# Altium PCB LV_Switcher_PCB.PcbDoc
Units mm, origin at the board's own origin, x right, y up, seen from the top; angles counter-clockwise.
Board outline 50 x 50 mm, 2 copper layers (Top Layer, Bottom Layer); 35 components, 16 nets, 154 pads, 430 vias.
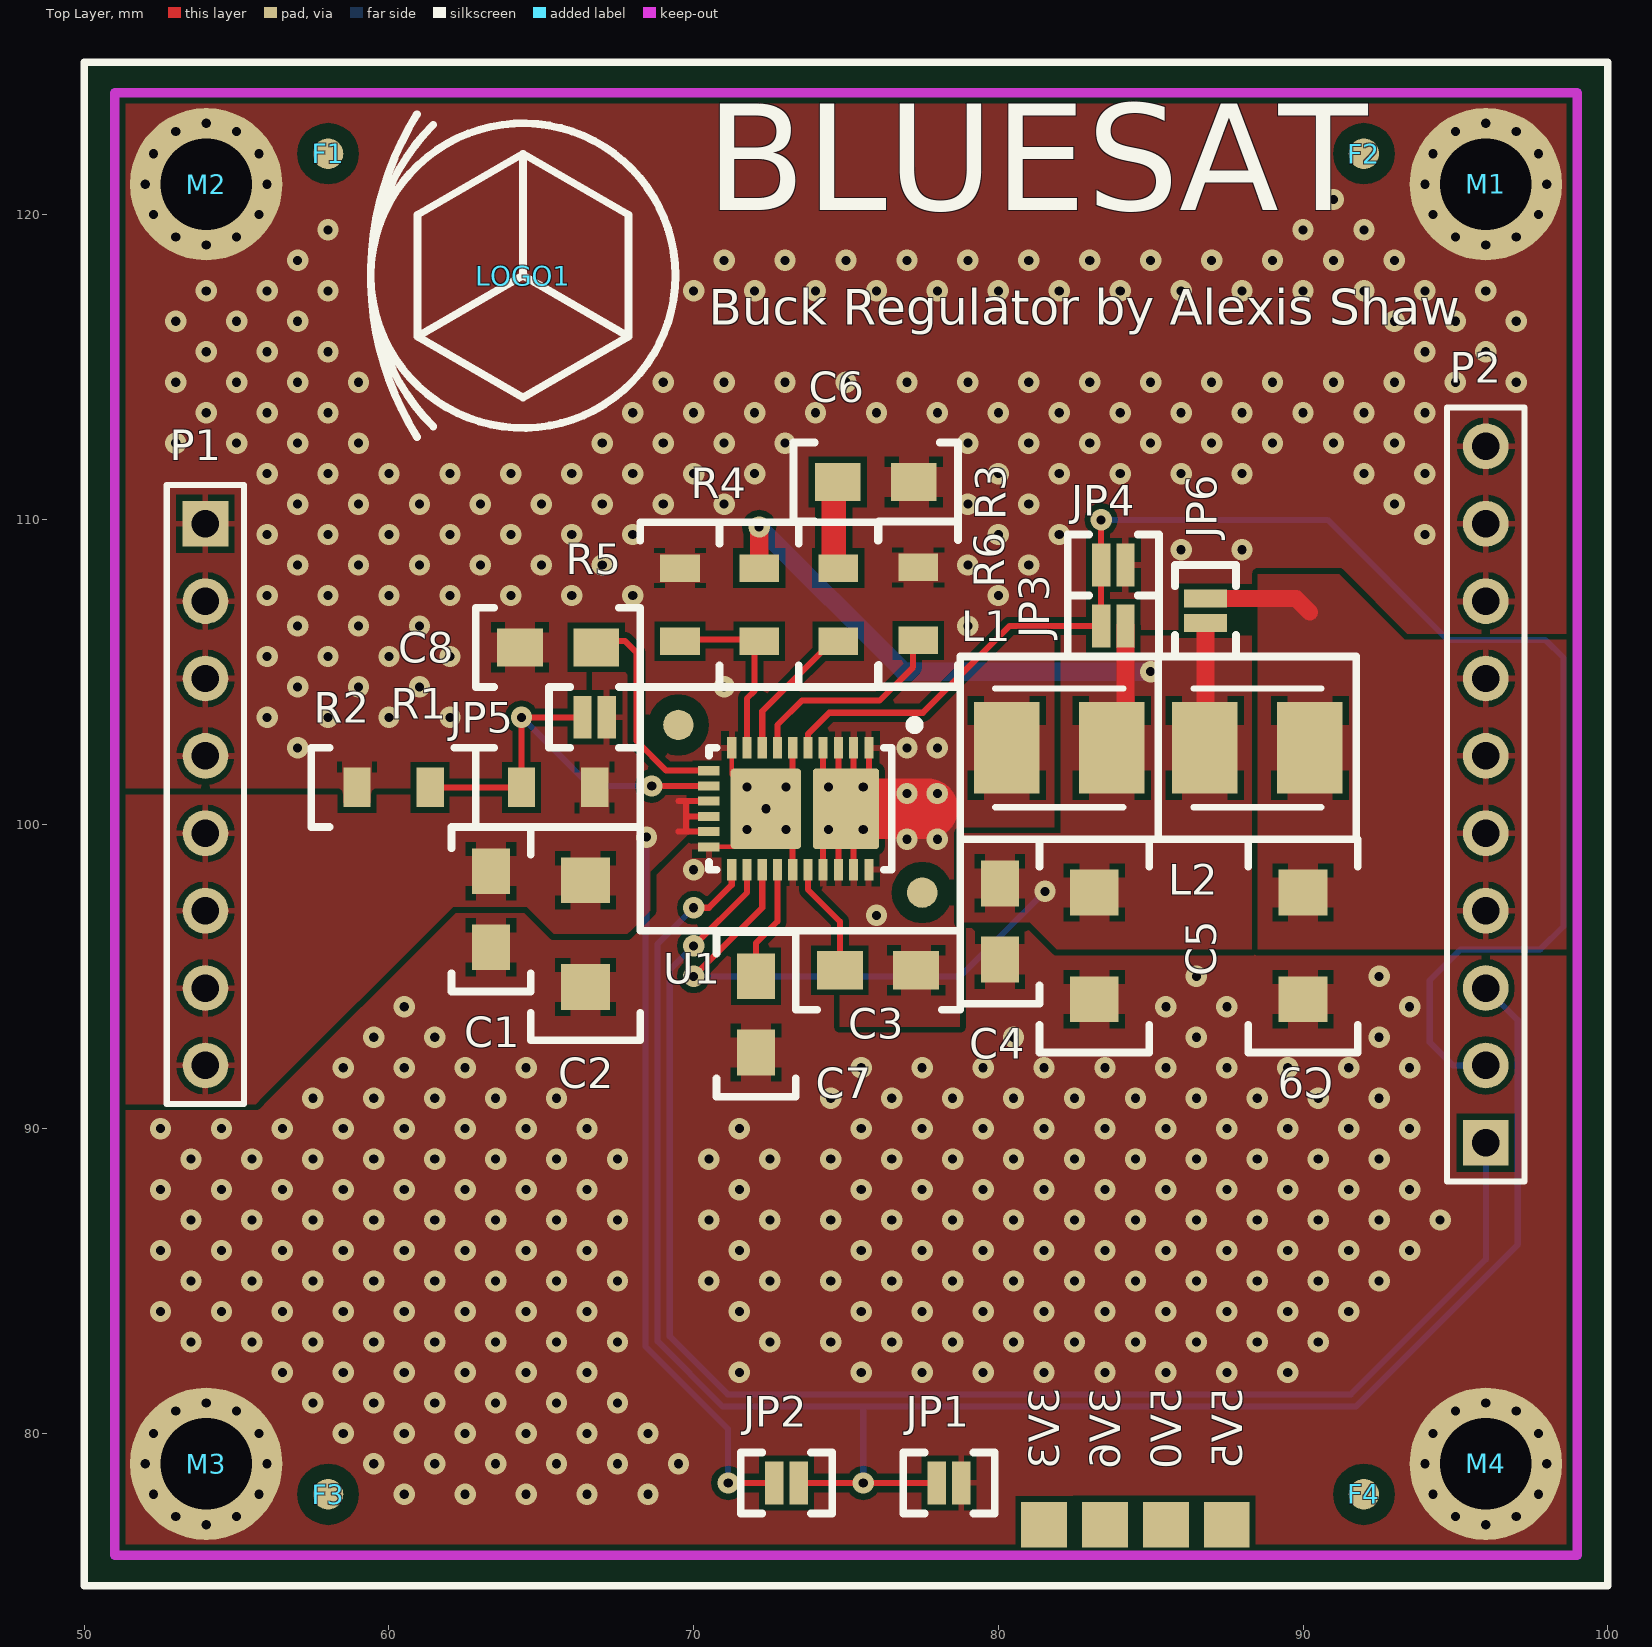
[diagram p0: Top Layer view]
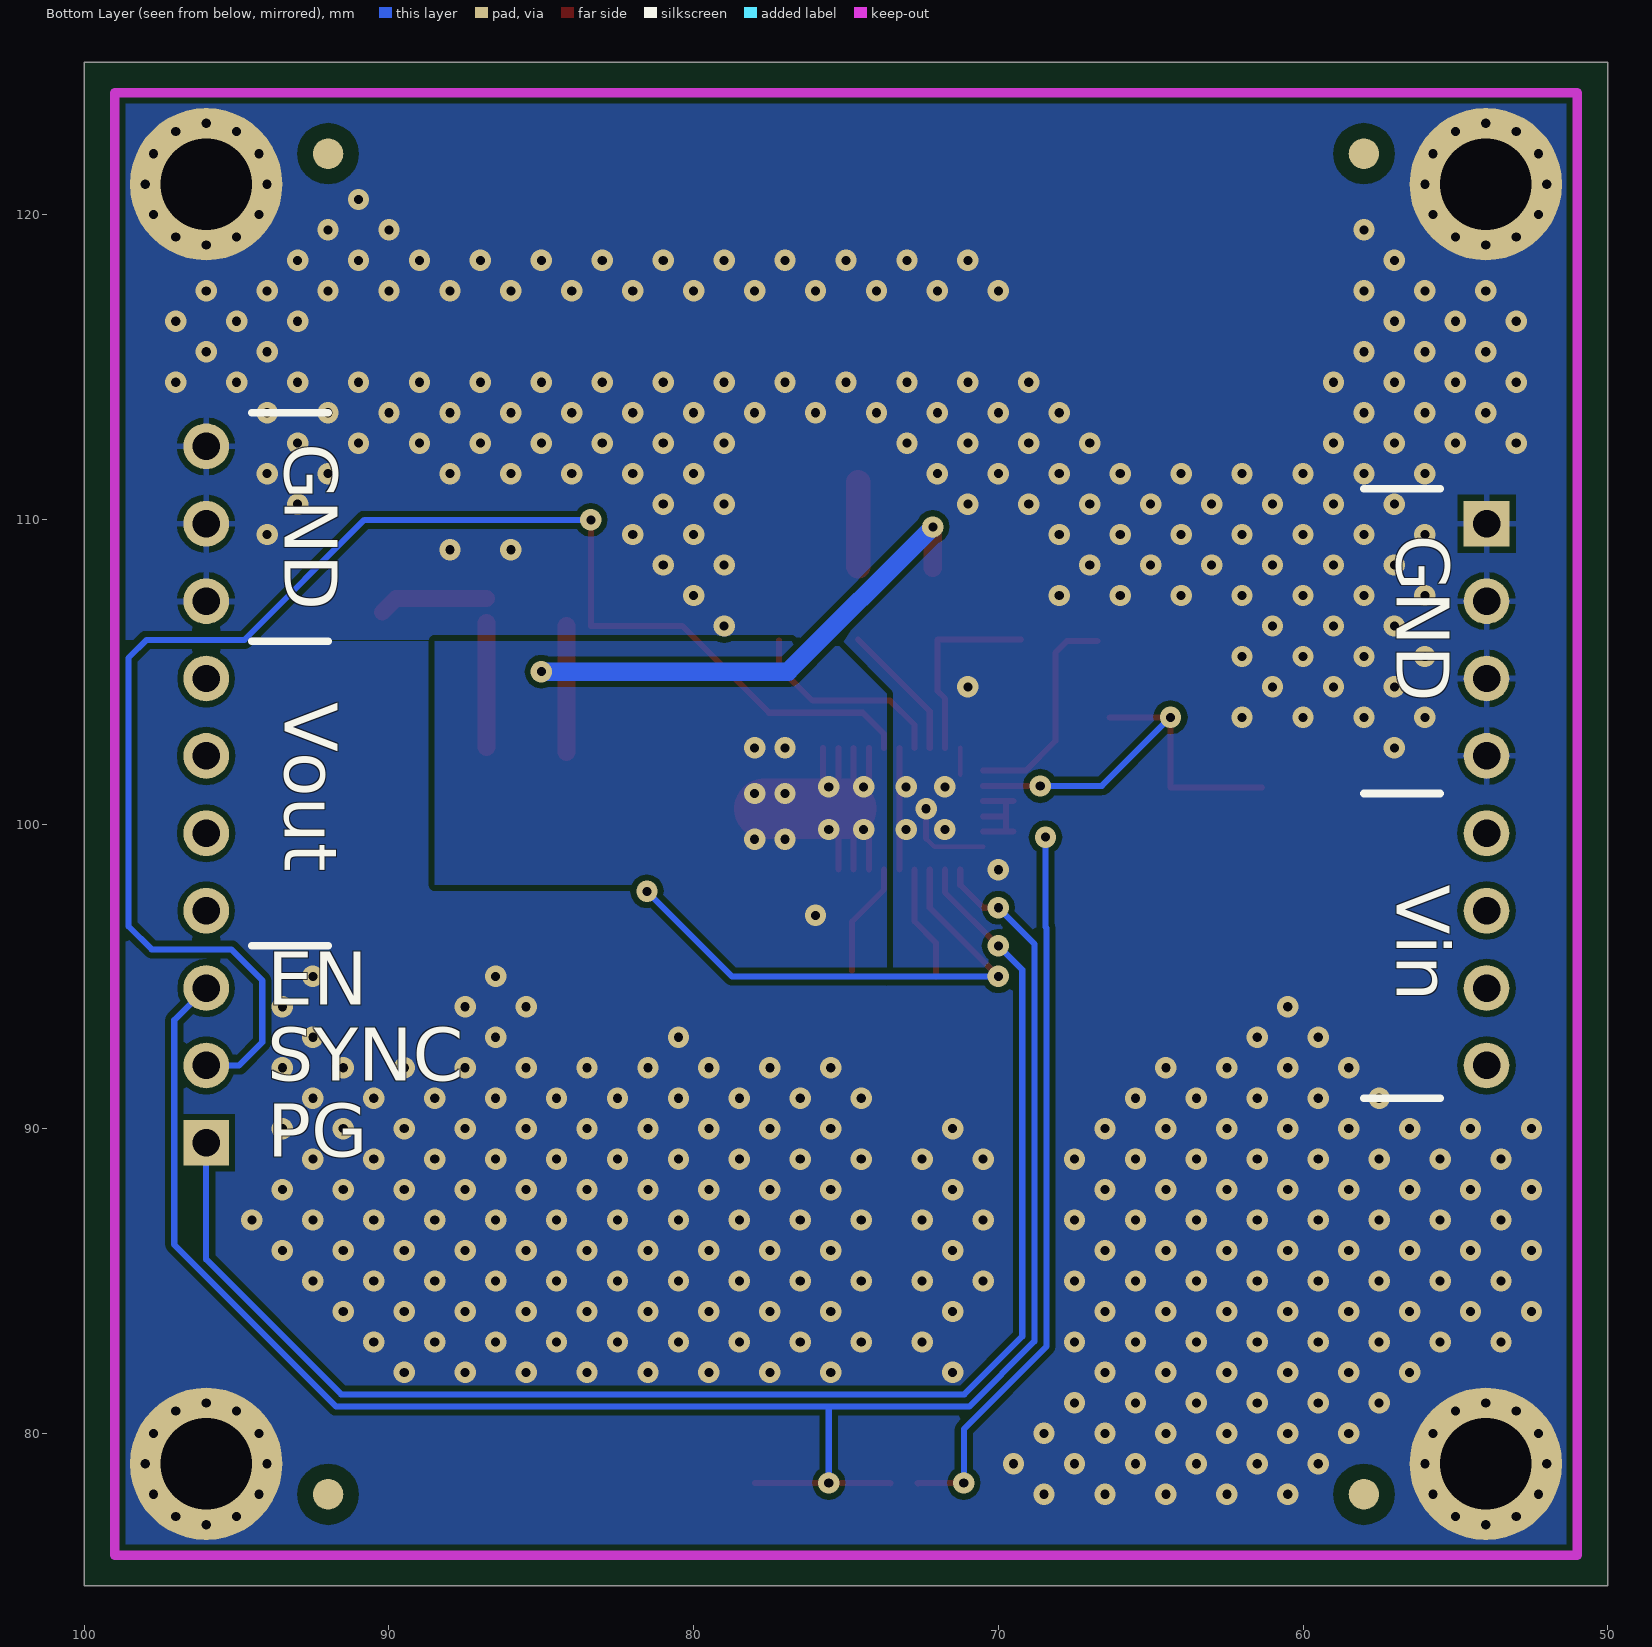
[diagram p1: Bottom Layer view, seen from below]

## Layer stack, top to bottom
Top Layer: signal copper 0.0356
Dielectric: dielectric 0.32, FR-4, Dk 4.8
Bottom Layer: signal copper 0.0356

## Board outline
50,75 100,75 100,125 50,125

## Design rules (kind name [scope] priority, off if disabled: settings)
Clearance Clearance_1 [All vs InPadClass('Fudicials')] p1: gap=0.5
Clearance [All] p2: gap=0.2
ComponentClearance [All] p1: gap=0 collisioncheckmode=3 verticalgap=0.254 showdistances=FALSE
HoleSize [All] p1: absolutevalues=TRUE maxlimit=3 minlimit=0.025 maxpercent=80.000 minpercent=20.000
MinimumSolderMaskSliver [All] p1: minsoldermaskwidth=0.1
PolygonConnect PolygonConnect_2 [All vs IsVia] p1: connectstyle=Direct reliefconductorwidth=0.254 reliefentries=4 polygonreliefangle="90 Angle"
PolygonConnect PolygonConnect_1 [All vs HasFootprint('Mounting_Hole')] p2: connectstyle=Direct reliefconductorwidth=0.254 reliefentries=4 polygonreliefangle="90 Angle"
PolygonConnect PolygonConnect_Caps [All vs HasFootprint('0805 Cap') OR HasFootprint('0805 Resistor') OR HasFootprint('1206 Cap')] p3: connectstyle=Relief reliefconductorwidth=1 reliefentries=4 polygonreliefangle="90 Angle"
PolygonConnect PolygonConnect_Inductors [All vs HasFootprint('INDP4037X16N')] p4: connectstyle=Relief reliefconductorwidth=1.5 reliefentries=4 polygonreliefangle="90 Angle"
PolygonConnect [All] p5: connectstyle=Relief reliefconductorwidth=0.2 reliefentries=4 polygonreliefangle="90 Angle"
RoomDefinition LV_Switcher [InComponentClass('LV_Switcher')] p1: confinementstyle=ConfineIn formatcopy=TRUE lockcomponents=FALSE outline 56.75,76 93,76 93,112.75 56.75,112.75
RoutingVias [All] p1: holewidth=0.3 width=0.7 viastyle="Through Hole" minholewidth=0.3 minwidth=0.7 maxholewidth=0.711 maxwidth=1.27
SilkscreenOverComponentPads [All] p1: minsilkscreentomaskgap=0.1
SolderMaskExpansion [All] p1: expansion=0.102
Width [All] p1: maxlimit=2 minlimit=0.15 preferedwidth=0.2
24 further rules are at their usual default settings.

## Classes and differential pairs
pad class Fudicials: F1-29 F2-29 F3-29 F4-29 U1-30 U1-31
component class LV_Switcher: C1 C2 C3 C4 C5 C6 C7 C8 JP1 JP2 JP3 JP4 JP5 L1 R1 R2 R3 R4 R5 R6 U1
component class Switching_Regulator_LV_Board: C9 F1 F2 F3 F4 JP6 L2 LOGO1 M1 M2 M3 M4 P1 P2

## Components (designator, comment, footprint, x,y, rotation, side; value= is the part's Value field where it differs from the comment)
C1 "0805 Cap" "0805 Cap" 63.35,97.2 r270 top
C2 "1206 Cap" "1206 Cap" 66.45,96.4 r270 top
C3 "0805 Cap" "0805 Cap" 76.05,95.2 r0 top
C4 "0805 Cap" "0805 Cap" 80.05,96.8 r270 top
C5 "1206 Cap" "1206 Cap" 83.15,96 r270 top
C6 "0805 Cap" "0805 Cap" 75.975,111.225 r0 top
C7 "0805 Cap" "0805 Cap" 72.05,93.75 r270 top
C8 "0805 Cap" "0805 Cap" 65.55,105.8 r180 top
C9 "0805 Cap" "1206 Cap" 90,96 r270 top
F1 "Fud" FUd 58,122 r0 top
F2 "Fud" FUd 92,122 r0 top
F3 "Fud" FUd 58,78 r0 top
F4 "Fud" FUd 92,78 r0 top
JP1 "Jumper" "Solder Jumper C" 78.383,78.372 r180 top
JP2 "Jumper" "Solder Jumper C" 73.049,78.372 r0 top
JP3 "Jumper" "Solder Jumper C" 83.775,106.5 r180 top
JP4 "Jumper" "Solder Jumper C" 83.775,108.5 r180 top
JP5 "Jumper" "Solder Jumper C" 66.75,103.5 r0 top
JP6 "Jumper" "Solder Jumper C" 86.8,107 r270 top
L1 "LQH44PN2R2MP0" INDP4037X16N 82,102.5 r0 top
L2 "LQH44PN2R2MP0" INDP4037X16N 88.5,102.5 r0 top
LOGO1 "Logo" BLUESAT_LOGO 64.4,118 r0 top
M1 "Mounting Hole" Mounting_Hole 96,121 r0 top
M2 "Mounting Hole" Mounting_Hole 54,121 r0 top
M3 "Mounting Hole" Mounting_Hole 54,79 r0 top
M4 "Mounting Hole" Mounting_Hole 96,79 r0 top
P1 "Header 8" HDR1X8 53.975,109.855 r270 top
P2 "Header 10" HDR1X10 96,89.535 r90 top
R1 "0805 Resistor" "0805 Resistor" 65.55,101.2 r180 top
R2 "0805 Resistor" "0805 Resistor" 60.15,101.2 r180 top
R3 "0805 Resistor" "0805 Resistor" 74.75,107.2 r90 top
R4 "0805 Resistor" "0805 Resistor" 72.15,107.2 r270 top
R5 "0805 Resistor" "0805 Resistor" 69.55,107.2 r90 top
R6 "0805 Resistor" "0805 Resistor" 77.375,107.225 r90 top
U1 "LT3690" LT3690 73.5,100.5 r180 top

## Footprints (in the part's own frame and the unit in brackets; to place one, negate y for a bottom-side part, rotate by r counter-clockwise, add the part's x,y. Pads: shape width x height; smd on the part's side, far side on the other; paste and mask are expansions set on the pad)
"0805 Cap" [mm] "0805 Capacitor"
  rect 1.5x1.25 smd: 1(1.25,0) 2(-1.25,0)
  silkscreen extent -2.7,-1.3 2.7,1.3, body extent -1,-0.63 1.1,0.63, height 0.9
"0805 Resistor" [mm] "0805 Resistor"
  rect 0.9x1.3 smd: 1(1.2,0) 2(-1.2,0)
  silkscreen extent -2.7,-1.3 2.7,1.3, body extent -1,-0.63 1.1,0.63, height 0.6
"1206 Cap" [mm] "1206 Capacitor"
  rect 1.5x1.6 smd: 1(1.75,0) 2(-1.75,0)
  silkscreen extent -3.5,-1.8 3.5,1.8, body extent -1.6,-0.8 1.6,0.8, height 1.8
BLUESAT_LOGO [mm]
  silkscreen extent -5,-5.3 5,5.3
FUd [mm]
  round 1 all layers, no hole mask+0.5: 29(0,0)
HDR1X8 [mm] "Connector; Header; 8 Position"
  rect 1.5x1.5 hole 0.9: 1(0,0)
  round 1.5 hole 0.9: 2(2.54,0) 3(5.08,0) 4(7.62,0) 5(10.16,0) 6(12.7,0) 7(15.24,0) 8(17.78,0)
  silkscreen extent -1.27,-1.27 19.05,1.27
HDR1X10 [mm] "Connector; Header; 10 Position"
  rect 1.5x1.5 hole 0.9: 1(0,0)
  round 1.5 hole 0.9: 2(2.54,0) 3(5.08,0) 4(7.62,0) 5(10.16,0) 6(12.7,0) 7(15.24,0) 8(17.78,0) 9(20.32,0) 10(22.86,0)
  silkscreen extent -1.27,-1.27 24.13,1.27
INDP4037X16N [mm] "Precision Wire Wound Inductor, 2-Leads, Body 4.0x3.7mm, IPC Medium Density"
  rect 2.15x3 smd: 1(-1.725,0) 2(1.725,0)
  silkscreen extent -3.25,-3 3.25,3, body extent -2.1,-1.95 2.1,1.95, height 1.65
LT3690 [mm]
  rect 0.3x0.7 smd mask+0.1: 1(-2.25,-2) 2(-1.75,-2) 3(-1.25,-2) 4(-0.75,-2) 5(-0.25,-2) 6(0.25,-2) 7(0.75,-2) 9(1.75,-2) 10(2.25,-2) 17(2.25,2) 18(1.75,2) 19(1.25,2) 20(0.75,2) 21(0.25,2) 22(-0.25,2) 23(-0.75,2) 24(-1.25,2) 25(-1.75,2) 26(-2.25,2)
  rect 0.3x0.7 smd paste+0 mask+0.1: 8(1.25,-2)
  rect 0.7x0.3 smd mask+0.1: 11(3,-1.25) 12(3,-0.75) 13(3,-0.25) 14(3,0.25) 15(3,0.75) 16(3,1.25)
  rrect10% 2.18x2.64 smd mask+0.1: 27(-1.5,0)
  rrect10% 2.31x2.64 smd mask+0.1: 28(1.13,0)
  round 1 smd mask+0.5: 30(-4,2.75) 31(4,-2.75)
  silkscreen extent -5.25,-4 5.25,4, body extent -3,-2 3,2, height 0.8
Mounting_Hole [mm]
  round 1 hole 0.3: 1(-2,0) 1(-1.732,-1) 1(-1.732,1) 1(-1,-1.732) 1(-1,1.732) 1(0,-2) 1(0,2) 1(1,-1.732) 1(1,1.732) 1(1.732,-1) 1(1.732,1) 1(2,0)
  round 5 hole 3: 1(0,0)
"Solder Jumper C" [mm] "Solder Jumper C"
  rect 0.6x1.4 smd: 1(0.4,0) 2(-0.4,0)
  silkscreen extent -1.5,-1 1.5,1

## Part data
C1 C3 C4 C7 C9: library part "0805 MLCC - X7R, 10%", "0805 MLCC - X7R, 10%"
C2 C5: library part "1206 MLCC - X7R, 10%", "1206 MLCC - X7R, 10%"
C6 C8: library part "0805 MLCC - NP0, 5%", "0805 MLCC - NP0, 5%"
F1 F2 F3 F4: library part Fudicial
JP1 JP2 JP3 JP4 JP5 JP6: library part "Solder Bridge", "Solder Bridge"
L1 L2: "Inductor 4x4mm 2.2uH"
LOGO1: library part "Bluesat Logo"
M1 M2 M3 M4: library part "Screw Hole"
P1: "Header, 8-Pin"
P2: "Header, 10-Pin"
R1 R2 R3 R4 R5 R6: library part "0805 Thick Film Resistor 1%", "0805 Thick Film Resistor 1%"

## Free pads (board coordinates)
  rect 1.5x1.5 smd: 2(81.5,77) 3(83.5,77) 4(85.5,77) 5(87.5,77)

## Via types
v1: diameter 0.7, hole 0.3, Top Layer to Bottom Layer, tented both sides, 430 vias

## Nets (pads, with @x,y where several pads share a name; then routed paths per layer and width w, separated by ;. In a path a pad name is that pad's centre, name@x,y a point inside that pad or via, vN(x,y) a via of type N, cw(c..) or ccw(c..) an arc to the next point about the centre after c; other vN are vias at no path point)
BST: C3.2 U1.22 | length 3.7
  Top Layer w0.2: U1.22 73.75,97.85 74.8,96.8 C3.2
EN: JP1.1 JP2.1 P2.3 U1.17 | length 63.9
  Top Layer w0.2: v1(70,97.25) 70.5,97.25 71.25,98 U1.17 ; JP2.1@73.533,78.359 73.546,78.372 v1(75.565,78.372) JP1.1
  Bottom Layer w0.2: v1(70,97.25) 68.815,96.065 68.815,83.019 70.954,80.88 75.565,80.88 ; v1(75.565,78.372) 75.565,80.88 ; P2.3 97.05,93.565 97.05,86.197 91.733,80.88 75.565,80.88
FB: R4.1 R5.2 U1.9 | length 6.4
  Top Layer w0.2: R5.2@69.25,106.05 72,106.05 72,104.375 71.75,104.125 U1.9
GND: C1.1 C2.1 C4.1 C5.1 C6.1 C7.1 C8.1 C9.1 JP1.2 JP4.2 M1.1 M2.1 M3.1 M4.1 P1.1 P1.2 P1.3 P1.4 P2.8 P2.9 P2.10 R2.1 R5.1 R6.1 U1.6 U1.10 U1.16 U1.21 U1.28 | length 7.8
  Top Layer w0.15: U1.16 72.1,99.25 U1.28@72.37,99.52 ; U1.28@71.25,101.62 U1.10
  Top Layer w0.2: U1.28@72.37,99.52 v1(72.37,100.5) ; U1.21 U1.6
  other v1: 60.5,78 62.5,78 64.5,78 66.5,78 68.5,78 59.5,79 61.5,79 63.5,79 65.5,79 67.5,79 69.5,79 58.5,80 60.5,80 62.5,80 64.5,80 66.5,80 68.5,80 57.5,81 59.5,81 61.5,81 63.5,81 65.5,81 67.5,81 56.5,82 58.5,82 60.5,82 62.5,82 64.5,82 66.5,82 71.5,82 75.5,82 77.5,82 79.5,82 81.5,82 83.5,82 85.5,82 87.5,82 89.5,82 53.5,83 55.5,83 57.5,83 59.5,83 61.5,83 63.5,83 65.5,83 67.5,83 72.5,83 74.5,83 76.5,83 78.5,83 80.5,83 82.5,83 84.5,83 86.5,83 88.5,83 90.5,83 52.5,84 54.5,84 56.5,84 58.5,84 60.5,84 62.5,84 64.5,84 66.5,84 71.5,84 75.5,84 77.5,84 79.5,84 81.5,84 83.5,84 85.5,84 87.5,84 89.5,84 91.5,84 53.5,85 55.5,85 57.5,85 59.5,85 61.5,85 63.5,85 65.5,85 67.5,85 70.5,85 72.5,85 74.5,85 76.5,85 78.5,85 80.5,85 82.5,85 84.5,85 86.5,85 88.5,85 90.5,85 92.5,85 52.5,86 54.5,86 56.5,86 58.5,86 60.5,86 62.5,86 64.5,86 66.5,86 71.5,86 75.5,86 77.5,86 79.5,86 81.5,86 83.5,86 85.5,86 87.5,86 89.5,86 91.5,86 93.5,86 53.5,87 55.5,87 57.5,87 59.5,87 61.5,87 63.5,87 65.5,87 67.5,87 70.5,87 72.5,87 74.5,87 76.5,87 78.5,87 80.5,87 82.5,87 84.5,87 86.5,87 88.5,87 90.5,87 92.5,87 94.5,87 52.5,88 54.5,88 56.5,88 58.5,88 60.5,88 62.5,88 64.5,88 66.5,88 71.5,88 75.5,88 77.5,88 79.5,88 81.5,88 83.5,88 85.5,88 87.5,88 89.5,88 91.5,88 93.5,88 53.5,89 55.5,89 57.5,89 59.5,89 61.5,89 63.5,89 65.5,89 67.5,89 70.5,89 72.5,89 74.5,89 76.5,89 78.5,89 80.5,89 82.5,89 84.5,89 86.5,89 88.5,89 90.5,89 92.5,89 52.5,90 54.5,90 56.5,90 58.5,90 60.5,90 62.5,90 64.5,90 66.5,90 71.5,90 75.5,90 77.5,90 79.5,90 81.5,90 83.5,90 85.5,90 87.5,90 89.5,90 91.5,90 93.5,90 57.5,91 59.5,91 61.5,91 63.5,91 65.5,91 74.5,91 76.5,91 78.5,91 80.5,91 82.5,91 84.5,91 86.5,91 88.5,91 90.5,91 92.5,91 58.5,92 60.5,92 62.5,92 64.5,92 75.5,92 77.5,92 79.5,92 81.5,92 83.5,92 85.5,92 87.5,92 89.5,92 91.5,92 93.5,92 59.5,93 61.5,93 80.5,93 86.5,93 92.5,93 60.5,94 85.5,94 87.5,94 93.5,94 86.5,95 92.5,95 70,98.5 71.755,99.822 73.025,99.822 71.755,101.219 73.025,101.219 57,102.5 56,103.5 58,103.5 60,103.5 62,103.5 57,104.5 59,104.5 61,104.5 71,104.5 56,105.5 58,105.5 60,105.5 62,105.5 57,106.5 59,106.5 61,106.5 79,106.5 56,107.5 58,107.5 60,107.5 62,107.5 64,107.5 66,107.5 68,107.5 80,107.5 57,108.5 59,108.5 61,108.5 63,108.5 65,108.5 67,108.5 79,108.5 81,108.5 86,109 88,109 56,109.5 58,109.5 60,109.5 62,109.5 64,109.5 66,109.5 68,109.5 80,109.5 82,109.5 94,109.5 57,110.5 59,110.5 61,110.5 63,110.5 65,110.5 67,110.5 69,110.5 71,110.5 79,110.5 81,110.5 93,110.5 56,111.5 58,111.5 60,111.5 62,111.5 64,111.5 66,111.5 68,111.5 70,111.5 72,111.5 80,111.5 82,111.5 84,111.5 86,111.5 88,111.5 92,111.5 94,111.5 53,112.5 55,112.5 57,112.5 59,112.5 67,112.5 69,112.5 71,112.5 73,112.5 79,112.5 81,112.5 83,112.5 85,112.5 87,112.5 89,112.5 91,112.5 93,112.5 54,113.5 56,113.5 58,113.5 68,113.5 70,113.5 72,113.5 74,113.5 76,113.5 78,113.5 80,113.5 82,113.5 84,113.5 86,113.5 88,113.5 90,113.5 92,113.5 94,113.5 53,114.5 55,114.5 57,114.5 59,114.5 69,114.5 71,114.5 73,114.5 75,114.5 77,114.5 79,114.5 81,114.5 83,114.5 85,114.5 87,114.5 89,114.5 91,114.5 93,114.5 95,114.5 97,114.5 54,115.5 56,115.5 58,115.5 94,115.5 96,115.5 53,116.5 55,116.5 57,116.5 93,116.5 95,116.5 97,116.5 54,117.5 56,117.5 58,117.5 70,117.5 72,117.5 74,117.5 76,117.5 78,117.5 80,117.5 82,117.5 84,117.5 86,117.5 88,117.5 90,117.5 92,117.5 94,117.5 96,117.5 57,118.5 71,118.5 73,118.5 75,118.5 77,118.5 79,118.5 81,118.5 83,118.5 85,118.5 87,118.5 89,118.5 91,118.5 93,118.5 58,119.5 90,119.5 92,119.5 91,120.5
NetC6_2: C6.2 R3.1 | length 2.8
  Top Layer w0.8: R3.1@74.6,108.45 C6.2@74.6,111.225
NetC9_2: C9.2 JP6.2 L2.2 P2.4 P2.5 P2.6 P2.7 | length 3.6
  Top Layer w0.55: JP6.2 89.775,107.4 90.225,106.95
PG: P2.1 U1.18 | length 49.7
  Top Layer w0.2: v1(70,96) 71.75,97.75 U1.18
  Bottom Layer w0.2: v1@70,95.919 v1(70,96) 69.215,95.215 69.215,83.185 71.12,81.28 91.567,81.28 96,85.713 P2.1
RT: R6.2 U1.7 | length 6.9
  Top Layer w0.2: U1.7 72.75,103.25 73.55,104.05 76.1,104.05 77.2,105.15 R6.2@77.2,106.025
SS: C8.2 U1.11 | length 7.2
  Top Layer w0.2: C8.2@66.75,106 67.75,106 68.125,105.625 68.125,102.725 69.1,101.75 U1.11
SW: C3.1 L1.1 U1.1 U1.2 U1.3 U1.4 U1.23 U1.24 U1.25 U1.26 U1.27 | length 16.7
  Top Layer w0.2: U1.23 74.25,101.219 U1.4 ; U1.24 U1.3 ; U1.25 75.25,100.5 U1.2 ; U1.27@75.75,100.5 U1.1
  Top Layer w2: U1.27 75.25,100.5 75.75,100.5 77.681,100.5
  other v1: 76,97 77,99.5 78,99.5 74.422,99.822 75.565,99.822 77,101 78,101 74.422,101.219 75.565,101.219 77,102.5 78,102.5
SYNC: JP3.1 JP4.1 P2.2 U1.5 | length 50.2
  Top Layer w0.2: U1.5 73.75,102.95 74.45,103.65 77.525,103.65 80.375,106.5 JP3.1 JP4.1 v1(83.375,109.982)
  Bottom Layer w0.2: v1(83.375,109.982) 90.805,109.982 94.742,106.045 97.958,106.045 98.55,105.453 98.55,96.645 97.79,95.885 95.175,95.885 94.159,94.869 94.159,92.837 94.921,92.075 P2.2
ULVO: JP5.2 R1.1 R2.2 U1.12 | length 14.4
  Top Layer w0.2: R2.2 R1.1 v1(64.35,103.5) JP5.2 ; v1(68.625,101.25) U1.12
  Bottom Layer w0.2: v1(64.35,103.5) 66.6,101.25 v1(68.625,101.25)
VC: R3.2 U1.8 | length 4.5
  Top Layer w0.2: U1.8 72.25,103.7 R3.2@74.6,106.05
VCCINT: C7.2 U1.20 | length 3.8
  Top Layer w0.2: C7.2 72.05,96.1 72.75,96.8 U1.20
VIN: C1.2 C2.2 JP2.2 JP5.1 P1.5 P1.6 P1.7 P1.8 R1.2 U1.13 U1.14 U1.15 | length 27.6
  Top Layer w0.2: 69.5,99.75 69.75,99.75 ; 69.5,100.75 69.75,100.75 ; U1.15 69.75,99.75 ; U1.14 69.75,100.25 ; U1.13 69.75,100.75 ; v1(71.133,78.372) JP2.2 JP2.2@72.636,78.359 ; 69.75,99.75 69.75,100.25 ; 69.75,100.25 69.75,100.75
  Bottom Layer w0.2: v1(68.453,99.568) 68.453,96.622 68.415,96.584 68.415,82.854 71.133,80.136 v1(71.133,78.372)
VOUT: C4.2 C5.2 JP3.2 JP6.1 L1.2 L2.1 R4.2 U1.19 | length 41.5
  Top Layer w0.2: v1(70,95) 72.25,97.25 U1.19
  Top Layer w0.6: R4.2 v1(72.15,109.75) ; L1.2@84.175,102.362 JP3.2 ; L2.1@86.8,102.525 JP6.1
  Bottom Layer w0.2: v1(70,95) 78.744,95 v1(81.534,97.79)
  Bottom Layer w0.6: v1(72.15,109.75) 76.9,105 v1(85,105)
pads on no net: F1.29 F2.29 F3.29 F4.29 U1.30 U1.31

## Polygon pours and split planes (outlines as drawn)
GND on Top Layer "Top Layer-No Net" (solid, pour order 25): 51,124 99,124 99,76 51,76
VIN on Top Layer "Top Layer-No Net" (solid, pour order 23): 51,100.965 60.325,100.965 64.389,100.965 64.35,101.004 64.35,103.5 66.797,103.5 66.802,103.505 66.75,103.557 66.75,106 67.75,106 68.125,105.625 68.125,102.725 68.199,102.651 69.1,101.75 69.1,101.5 69.85,100.75 69.85,99.695 68.58,98.425 68.58,97.155 67.818,96.393 65.405,96.393 64.516,97.282 62.103,97.282 55.88,91.059 55.626,90.805 51,90.805
VIN on Top Layer "Top Layer-No Net" (solid, pour order 17): 66.75,106 67.75,106 68.125,105.625 68.125,102.725 69.1,101.75 69.75,101.1 69.75,100.75 69.75,99.75 69.723,99.723 69.723,99.568 69.215,99.06 68.58,98.425 68.58,97.79 68.58,97.155 67.945,96.52 67.818,96.393 65.405,96.393 64.516,97.282 64.135,97.282 62.484,97.282 62.103,97.282 62.103,101.2 64.35,101.2 64.35,103.5 65.405,103.5 65.659,103.5 65.664,103.505 66.675,103.505 66.675,105.925 66.75,106
SW on Top Layer "Top Layer-No Net" (solid, pour order 15): 82.042,106.5 80.375,106.5 77.525,103.65 74.45,103.65 73.75,102.95 73.75,98.5 73.75,97.85 74.8,96.8 74.8,95.2 74.8,93.348 74.803,93.345 78.74,93.345 78.74,99.695 82.042,99.695
VOUT on Top Layer "Top Layer-No Net" (solid, pour order 13): 88.315,106.172 84.675,106.172 84.675,105.6 84.611,105.664 82.875,105.664 82.875,106.497 82.931,106.553 82.878,106.5 82.042,106.5 82.042,99.695 78.74,99.695 78.74,96.774 81.026,96.774 81.915,95.885 88.315,95.885
NetC9_2 on Top Layer "Top Layer-No Net" (solid, pour order 9): 99,95.885 88.646,95.885 88.519,95.885 88.519,108.204 91.186,108.204 93.345,106.045 99,106.045
GND on Bottom Layer "Bottom Layer-No Net" (solid, pour order 14): 88.5,106 99,106 99,76 74,76 73.66,76.34 73.66,76.357 73.66,94.66 74,95 78.744,95 81.534,97.79 81.749,98.005 88.5,98.005
SW on Bottom Layer "Bottom Layer-No Net" (solid, pour order 10): 73.66,95.306 73.966,95 78.744,95 81.534,97.79 81.744,98 88.5,98 88.5,106 75.5,106 75.393,106 73.66,104.267
GND on Bottom Layer "Top Layer-No Net" (solid, pour order 29): 73.66,100.33 73.66,104.267 75.184,105.791 75.438,106.045 96.012,106.045 98.679,106.045 99,106.045 99,124 51,124 51,76 73.66,76

## Keep-outs
Keep-Out Layer:
  lines w0.3: 51,76 99,76 99,124 51,124 51,76

## Silkscreen, mask and mechanical layers (free items; w line width, h text height)
Top Overlay:
  the board outline again, w0.254
  text "Buck Regulator by Alexis Shaw" at 70.5,116 h2
  text "3V3" at 82,81.5 h1 r90
  text "3V6" at 84,81.5 h1 r90
  text "5V0" at 86,81.5 h1 r90
  text "5V5" at 88,81.5 h1 r90
Bottom Overlay:
  lines w0.254: 55.5,91 58,91 ; 55.5,101 58,101 ; 55.5,111 58,111 ; 92,96 94.5,96 ; 92,106 94.5,106 ; 92,113.5 94.5,113.5
  text "GND" at 94,112.5 h3 r90
  text "GND" at 57.5,109.5 h3 r90
  text "Vout" at 94,104 h3 r90
  text "Vin" at 57.5,98 h3 r90
  text "EN" at 94,93.5 h3
  text "SYNC" at 94,91 h3
  text "PG" at 94,88.5 h3

## Dimensions
51,76 to 99,76 on Mechanical 1
51,76 to 52,126 on Mechanical 1

## Text inside footprints (layer, text, board x,y; h text height)
LOGO1: Top Overlay "BLUESAT" at 70.4,119 h6